# Altium PCB optical-electric-module.PcbDoc
Units mm, origin at the board's own origin, x right, y up, seen from the top; angles counter-clockwise.
Board outline 20.19 x 22.86 mm, 2 copper layers (Top Layer, Bottom Layer); 17 components, 11 nets, 58 pads, 15 vias.
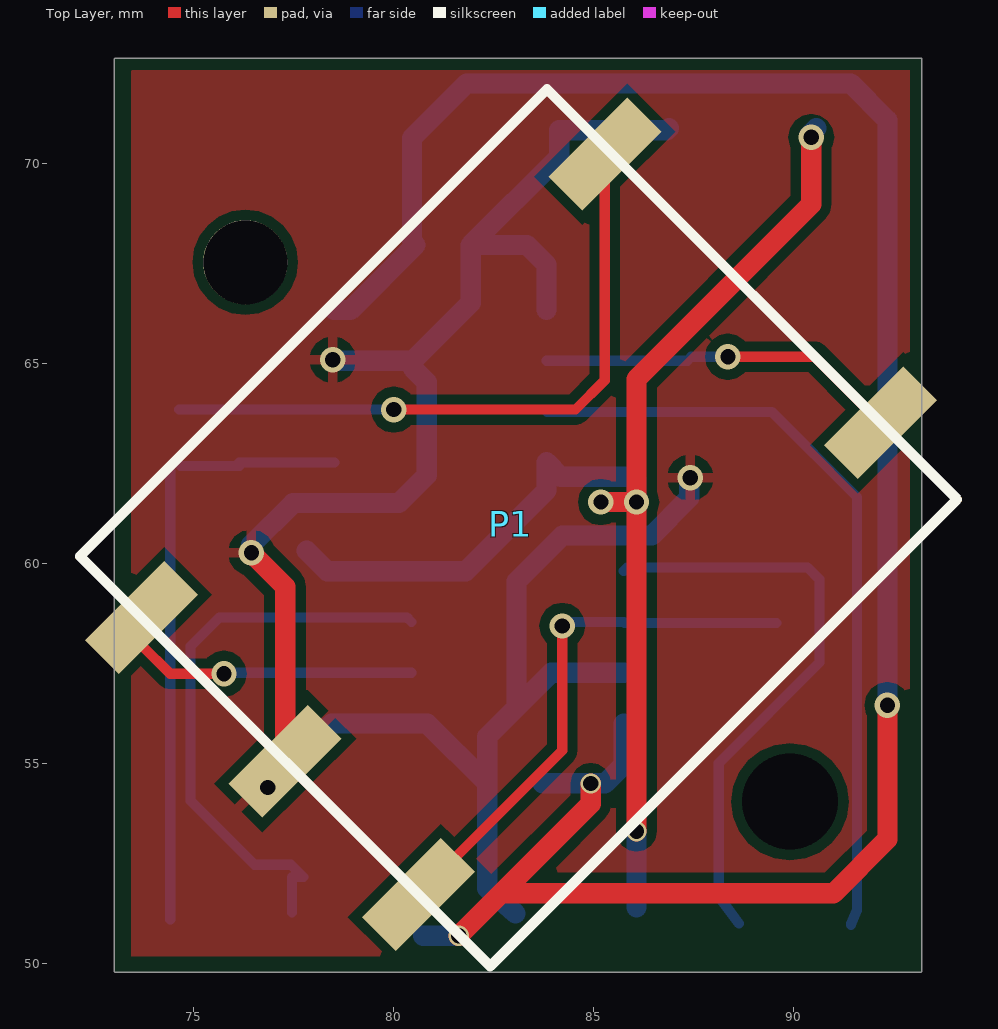
[diagram p0: Top Layer view]
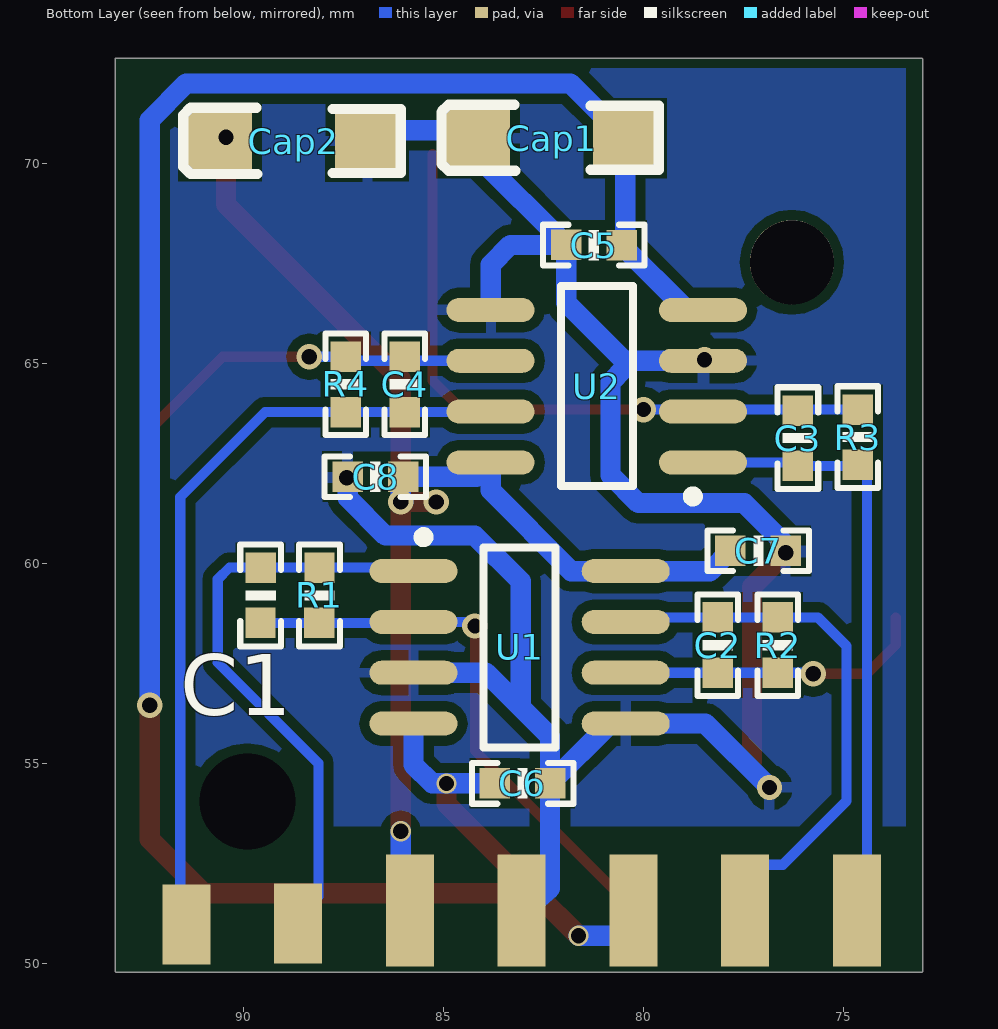
[diagram p1: Bottom Layer view, seen from below]

## Layer stack, top to bottom
Top Layer: signal copper 0.0356
Dielectric: dielectric 0.32, FR-4, Dk 4.8
Bottom Layer: signal copper 0.0356

## Board outline
73.025,49.809 73.05,49.784 93.193,49.784 93.218,49.809 93.218,72.644 73.05,72.644 73.025,72.619

## Design rules (kind name [scope] priority, off if disabled: settings)
Clearance [All] p1: gap=0.254
PolygonConnect [All] p1: connectstyle=Relief reliefconductorwidth=0.254 reliefentries=4 polygonreliefangle="90 Angle" airgapwidth=0.254
RoutingVias [All] p1: holewidth=0.711 width=1.27 viastyle="Through Hole" minholewidth=0.711 minwidth=1.27 maxholewidth=0.711 maxwidth=1.27
SolderMaskExpansion [All] p1: expansion=0.102
Width [All] p1: maxlimit=0.762 minlimit=0.254 preferedwidth=0.254
28 further rules are at their usual default settings.

## Components (designator, comment, footprint, x,y, rotation, side; value= is the part's Value field where it differs from the comment)
C1 "104" 0603P 89.586,59.207 r90 bottom
C2 "104" 0603P 78.156,57.963 r90 bottom
C3 "104" 0603P 76.149,63.144 r270 bottom
C4 "104" 0603P 85.979,64.491 r270 bottom
C5 "104" 0603P 81.255,67.97 r180 bottom
C6 "104" 0603P 83.033,54.508 r0 bottom
C7 "104" 0603P 77.14,60.325 r0 bottom
C8 "104" 0603P 86.716,62.179 r180 bottom
Cap1 "3电解电容" 电容-3216 79.578,70.51 r0 bottom
Cap2 "3电解电容" 电容-3216 86.03,70.434 r0 bottom
P1 "S5981" S5981 82.423,49.936 r135 top
R1 "10K" 0603P 88.113,59.207 r90 bottom
R2 "10K" 0603P 76.657,57.963 r90 bottom
R3 "10K" 0603P 74.651,63.17 r270 bottom
R4 "10K" 0603P 87.452,64.491 r270 bottom
U1 "AD708" NSO8_N 83.109,57.912 r180 bottom
U2 "AD708" NSO8_N 81.178,64.44 r0 bottom

## Footprints (in the part's own frame and the unit in brackets; to place one, negate y for a bottom-side part, rotate by r counter-clockwise, add the part's x,y. Pads: shape width x height; smd on the part's side, far side on the other; paste and mask are expansions set on the pad)
0603P [mil]
  rect 30x30 smd: 1(-27,0) 2(27.5,-0.06)
  silkscreen extent -50,-20 50,20
NSO8_N [mm] "SOIC-max660"
  oval 2.2x0.6 smd: 1(-2.654,1.905) 2(-2.654,0.635) 3(-2.654,-0.635) 4(-2.654,-1.905) 5(2.654,-1.905) 6(2.654,-0.635) 7(2.654,0.635) 8(2.654,1.905)
  silkscreen extent -2.53,-2.5 0.9,2.88, body extent -1.95,-2.45 1.95,2.45, height 1.75
S5981 [mm]
  rect 1.2x2.8 smd: 0(7.25,0) 1(2.54,0) 2(12.33,0) 3(12.33,-16.383) 4(2.71,-16.51)
  silkscreen extent 0,-16.51 14.5,0
电容-3216 [mm]
  rect 1.6x1.52 smd: 1(0.889,-0.127) 2(4.572,-0.127)
  silkscreen extent 0.05,-0.97 5.49,0.69, body extent 1.02,-0.93 4.41,0.67, height 1.6

## Part data
C1 C2 C3 C4 C5 C6 C7 C8: library part C
Cap1 Cap2: "Polarized Capacitor (Radial)"
P1: library part Component_1
R1 R2 R3 R4: library part R
U1 U2: library part LM358, "双运放"

## Free pads (board coordinates)
  rect 1.2x2.8 smd far side: 1(74.676,51.333) 1(77.47,51.333) 1(80.264,51.333) 1(83.058,51.333) 1(85.852,51.333)
  rect 1.2x2 smd far side: 1(88.646,51.003) 1(91.44,50.978)
  round 2.1 hole 2.4: 7(89.916,54.051)
  round 2.1 hole 2.1: 8(76.302,67.539)

## Via types
v1: diameter 0.635, hole 0.381, Top Layer to Bottom Layer, 12 vias
v2: diameter 0.508, hole 0.381, Top Layer to Bottom Layer, 3 vias

## Nets (pads, with @x,y where several pads share a name; then routed paths per layer and width w, separated by ;. In a path a pad name is that pad's centre, name@x,y a point inside that pad or via, vN(x,y) a via of type N, cw(c..) or ccw(c..) an arc to the next point about the centre after c; other vN are vias at no path point)
-VCC: C7.2 C8.2 Cap2.2 pad.1@85.852,51.333 U1.8 U2.8 | length 32.9
  Top Layer w0.508: v1(85.192,61.544) v1(86.081,61.544) ; v2(86.081,53.315) v1(86.081,61.544) ; v1(90.449,70.663) 90.449,68.986 86.081,64.618 v1(86.081,61.544)
  Bottom Layer w0.508: C7.2 78.348,59.817 U1.8 81.813,59.817 83.832,61.836 U2.8 84.19,62.178 C8.2 ; v1@86.017,61.544 v1(86.081,61.544) C8.2@86.081,62.114 ; pad.1@86.081,51.41 v2(86.081,53.315) ; Cap2.2@90.399,70.714 Cap2.2@90.576,70.891
GND: C5.1 C6.1 C7.1 C8.1 Cap1.2 Cap2.1 P1.0 pad.1@83.058,51.333 U1.3 U1.5 U2.3 U2.5 | length 53.5
  Top Layer w0.508: v1(76.454,60.274) 77.296,59.432 P1.0
  Bottom Layer w0.508: C7.1 76.454,60.477 77.495,61.519 80.137,61.519 80.835,62.217 80.835,64.54 80.493,64.883 80.493,65.075 ; v1(76.86,54.407) 78.461,56.007 U1.5 80.848,56.007 C6.1 ; U2.3 80.493,65.075 ; pad.1@83.058,51.257 82.347,51.892 C6.1 ; 83.083,56.413 83.083,59.563 84.226,60.706 86.462,60.706 87.401,61.646 C8.1 ; U2.5 83.832,67.475 83.337,67.97 C5.1 ; U1.3 83.947,57.277 82.347,55.677 C6.1 ; Cap2.1@86.893,70.891 86.843,70.841 84.15,70.841 84.15,70.18 C5.1 ; 80.493,65.075 81.94,66.523 C5.1
  other v1: 87.427,62.154 78.486,65.1
IN1: C1.1 P1.1 R1.1 U1.2 | length 13.5
  Top Layer w0.254: P1.1 84.226,55.332 v1(84.226,58.445)
  Bottom Layer w0.254: v1@84.328,58.547 U1.2 85.788,58.522 R1.1 C1.1
IN2: C2.1 P1.2 R2.1 U1.6 | length 7.7
  Top Layer w0.254: P1.2 73.704,57.969 74.422,57.252 v1(75.768,57.252)
  Bottom Layer w0.254: v1@75.794,57.277 R2.1 C2.1 U1.6
IN3: C3.1 P1.3 R3.1 U2.2 | length 16.6
  Top Layer w0.254: v1(80.01,63.856) 84.557,63.856 85.289,64.588 P1.3
  Bottom Layer w0.254: R3.1 v1(80.01,63.856)
IN4: C4.1 P1.4 R4.1 U2.6 | length 8.9
  Top Layer w0.254: v1(88.367,65.176) 90.532,65.176 P1.4
  Bottom Layer w0.254: U2.6 R4.1@87.351,65.075 ; R4.1 v1(88.367,65.176)
OUT1: C1.2 pad.1@88.646,51.003 R1.2 U1.1 | length 14.9
  Bottom Layer w0.254: U1.1 85.852,59.906 R1.2 C1.2 90.361,59.906 90.653,59.614 90.653,57.531 88.138,55.016 88.138,51.689 pad.1@88.646,51.003
OUT2: C2.2 pad.1@77.47,51.333 R2.2 U1.7 | length 14.5
  Bottom Layer w0.254: pad.1@77.47,51.283 77.47,52.172 77.749,52.172 77.445,52.476 76.53,52.476 74.932,54.075 74.932,57.937 75.656,58.661 R2.2 C2.2 80.34,58.661 U1.7
OUT3: C3.2 pad.1@74.676,51.333 R3.2 U2.1 | length 15.1
  Bottom Layer w0.254: pad.1@74.424,51.103 R3.2@74.424,62.344 ; R3.2@74.678,62.446 C3.2 ; C3.2@76.151,62.535 U2.1
OUT4: C4.2 pad.1@91.44,50.978 R4.2 U2.7 | length 19.4
  Bottom Layer w0.254: U2.7@83.845,63.792 C4.2 R4.2 89.471,63.792 91.592,61.671 91.592,51.333 pad.1@91.44,50.978
VCC: C5.2 C6.2 Cap1.1 pad.1@80.264,51.333 U1.4 U2.4 | length 55.6
  Top Layer w0.508: v2(81.636,50.698) 82.702,51.765 ; v2(84.938,54.508) 84.938,54 82.702,51.765 ; v1(92.354,56.464) 92.354,53.111 91.008,51.765 82.702,51.765
  Bottom Layer w0.508: U2.4 78.932,66.345 C5.2 ; C5.2@80.467,68.058 Cap1.1 81.839,72.009 91.44,72.009 92.354,71.095 v1(92.354,56.464) ; pad.1@80.747,50.698 v2(81.636,50.698) ; C6.2 85.295,54.51 85.763,54.978 U1.4

## Polygon pours and split planes (outlines as drawn)
GND on Bottom Layer "Bottom Layer-No Net" (solid, remove dead copper, pour order 6): 92.939,72.39 73.456,72.39 73.456,53.441 73.431,53.416 73.456,53.441 92.939,53.441
GND on Top Layer "Bottom Layer-No Net" (solid, remove dead copper, pour order 8): 92.913,72.339 73.431,72.339 73.456,72.314 73.456,50.19 92.888,50.19 92.913,50.215

## Silkscreen, mask and mechanical layers (free items; w line width, h text height)
Mechanical 1:
  the board outline again, w0.254